# Altium PCB oxi_dev3.PcbDoc
Units mil, origin at the board's own origin, x right, y up, seen from the top; angles counter-clockwise.
Board outline 6000 x 4000 mil, 2 copper layers (Top Layer, Bottom Layer); 52 components, 44 nets, 322 pads, 0 vias.
Unrouted connection lines stored in the file: 158.
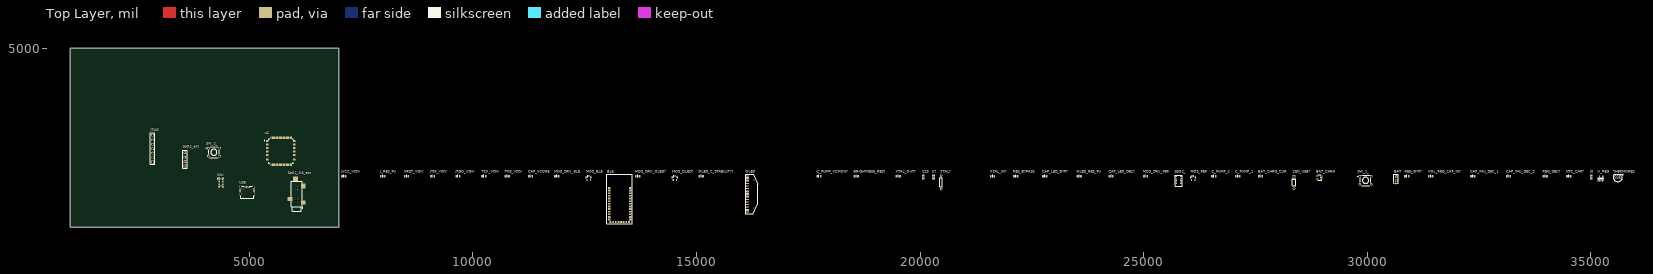
[diagram p0: Top Layer view]
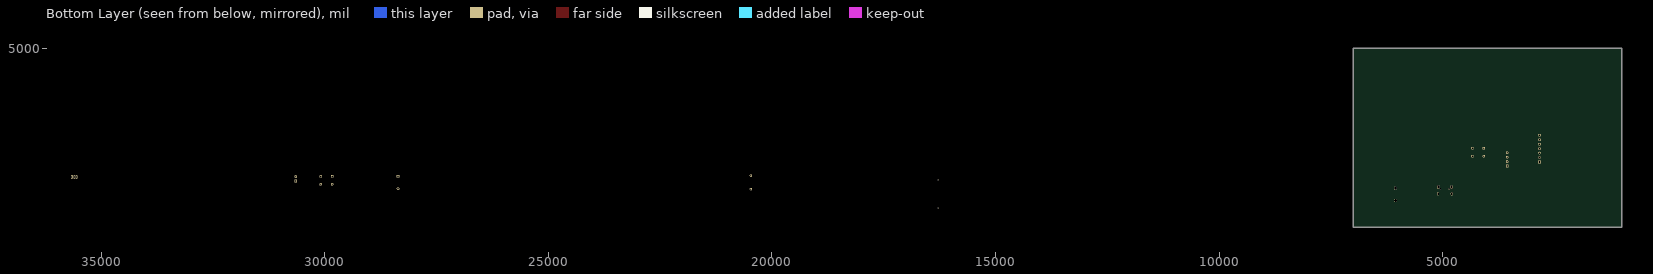
[diagram p1: Bottom Layer view, seen from below]

## Layer stack, top to bottom
Top Solder: solder mask 0.4, Solder Resist, Dk 3.5
Top Layer: signal copper 1.4
Dielectric 1: dielectric 12.6, FR-4, Dk 4.8
Bottom Layer: signal copper 1.4
Bottom Solder: solder mask 0.4, Solder Resist, Dk 3.5

## Board outline
1000,1000 7000,1000 7000,5000 1000,5000

## Design rules (kind name [scope] priority, off if disabled: settings)
Clearance [All] p1: gap=10 ignorepadtopadclearanceinfootprint=FALSE except(0: Arc-Hole Track-Hole SMDPad-Hole THPad-Hole Via-Hole Fill-Hole Poly-Hole Region-Hole Text-Hole)
PolygonConnect [All] p1: connectstyle=Relief reliefconductorwidth=10 reliefentries=4 polygonreliefangle="90 Angle" airgapwidth=10
RoutingVias [All] p1: holewidth=28 width=50 viastyle="Through Hole" minholewidth=28 minwidth=50 maxholewidth=28 maxwidth=50
SolderMaskExpansion [All] p1: expansion=4
Width [All] p1: maxlimit=10 minlimit=10 preferedwidth=10
30 further rules are at their usual default settings.

## Components (designator, comment, footprint, x,y, rotation, side; value= is the part's Value field where it differs from the comment)
BAT "Battery" BAT-2 30645,2080 r90 top
BAT_CHRG "LTC4054-4.2" S5 28925,2110 r90 top
BAT_CHRG_CUR "TBD" SMD-0805C 27610,2140 r90 top
BLE "HM-16" HM-16 13030,2155 r0 top
BRIGHTNESS_RES? "Res3" SMD-0805C 18570,2140 r90 top value=390k
C23 "Cap Dec msp VCC" SMD-0805C 20070,2120 r0 top value=4.7uF
C? "Cap Dec msp VCC" SMD-0805C 20300,2120 r0 top value=100nF
C_PUMP_1 "Cap Semi" SMD-0805C 27100,2140 r90 top value=1uF
C_PUMP_2 "Cap Semi" SMD-0805C 26570,2140 r90 top value=1uF
C_PUMP_VCMON? "Cap Semi" SMD-0805C 17740,2140 r90 top value=10uF
CAP_IMU_DEC_1 "Cap Semi" SMD-0805C 32355,2140 r90 top value=10uF
CAP_IMU_DEC_2 "Cap Semi" SMD-0805C 33155,2140 r90 top value=0.1uF
CAP_LED_BYP? "Cap Semi" SMD-0805C 22790,2140 r90 top value=0.1nF
CAP_LED_DEC? "Cap Semi" SMD-0805C 24270,2140 r90 top value=10nF
CAP_VCORE "Cap Semi" SMD-0805C 11290,2140 r90 top value=470nF
IMU "ADXL345" ADXL345 4370,2000.87 r0 top
J0 "SC_USB_ONLY" SMD-0805C 35005,2120 r0 top
J_RES_PU "10k" SMD-0805C 7985,2140 r90 top value=1K
JTAG "Header 7" HDR1X7 2840,2455 r90 top
JTDI_VDIV "100" SMD-0805C 9100,2140 r90 top value=1K
JTDO_VDIV "100" SMD-0805C 9670,2140 r90 top value=1K
JVCC_VDIV "22" SMD-0805C 7115,2140 r90 top value=1K
MOS_BLE "FDN360P" SOT23_N 12595,2095 r90 top
MOS_DRV_BLE "10K" SMD-0805C 11880,2140 r90 top value=1K
MOS_DRV_OLED? "10K" SMD-0805C 13685,2140 r90 top value=1K
MOS_DRV_PER "10K" SMD-0805C 25040,2140 r90 top value=1K
MOS_OLED? "FDN360P" SOT23_N 14520,2095 r90 top
MOS_PER "FDN360P" SOT23_N 26110,2095 r90 top
NRST_VDIV "100" SMD-0805C 8520,2140 r90 top value=1K
NTC_CAP? "Cap Semi" SMD-0805C 34505,2140 r90 top value=10uF
OLED "OLED" OLED0.96_NO3D 16140,1340 r90 top
OLED_C_STABILITY? "Cap Semi" SMD-0805C 15105,2140 r90 top value=10uF
OLED_RES_PU "Res3" SMD-0805C 23560,2140 r90 top value=4.7k
REG_BYP? "1uf" SMD-0805C 30885,2140 r90 top
REG_DEC? "2.2uf" SMD-0805C 33975,2140 r90 top
RES_BYPASS "Cap Semi" SMD-0805C 22140,2140 r90 top value=10uF
SpO2_ "MAX30102EFD+" PSON80P330X560X165-14N 25780,2040 r0 top
SpO2_3.5_ext "SJ-3524-SMT" CUI_SJ-3524-SMT 6065,1594.41 r90 top
SpO2_ext "Header 4" HDR1X4 3565,2365 r90 top
SW_1_ "SW DIP-2" PUSH_BTN 29955,2045 r0 top
SW_2_ "SW DIP-2" PUSH_BTN 4207.95,2673.58 r0 top
TCK_VDIV "100" SMD-0805C 10250,2140 r90 top value=1K
THERMORES "MCP9700A-E/TO" TO-92-TO3 35600,2120 r90 top
TMS_VDIV "100" SMD-0805C 10770,2140 r90 top value=1K
uC "MSP430F5438AIPZ" QFP50P1600X1600X160-100N 5711.97,2699.06 r0 top
USB "Micro USB 2.0 Type B Receptacle" 629105150521 4955,1780 r0 top
V_REG "MIC5205" SOT-23-OT5_N 35225,2090 r90 top
VOL_REG_CAP_IN? "Cap Semi" SMD-0805C 31415,2140 r90 top value=10uF
XTAL? "XTAL" AXIAL-0.3 20470,2000 r90 top
XTAL_IN? "Cap Semi" SMD-0805C 21620,2140 r90 top value=4.3pF
XTAL_OUT? "Cap Semi" SMD-0805C 19510,2140 r90 top value=4.3pF
ZEN_USB? "5V" DO-35 28360,2000 r90 top

## Footprints (in the part's own frame and the unit in brackets; to place one, negate y for a bottom-side part, rotate by r counter-clockwise, add the part's x,y. Pads: shape width x height; smd on the part's side, far side on the other; paste and mask are expansions set on the pad)
629105150521 [mm] "Micro USB 2.0 SMT Type B Horizontal 5 Contacts High Current"
  rect 0.45x1.3 smd: 1(-1.3,2.9) 2(-0.65,2.9) 3(0,2.9) 4(0.65,2.9) 5(1.3,2.9)
  round 0.8 hole 0.8 unplated: MH1(-2.5,1.85) MH2(2.5,1.85)
  oval 1.45x2 hole 0.85 slot 1.4 at 90 deg: S1(-3.725,2.9) S2(3.725,2.9)
  oval 1.15x1.8 hole 0.55 slot 1.2 at 90 deg: S3(-3.875,-0.9) S4(3.875,-0.9)
  silkscreen extent -4,-3.3 4,3.3, body extent -4,-3.3 4,3.3, height 2.75
ADXL345 [mm]
  rect 0.92x0.61 smd: 1(-1.01,2) 2(-1.01,1.2) 3(-1.01,0.4) 4(-1.01,-0.4) 5(-1.01,-1.2) 6(-1.01,-2) 8(1.01,-2) 9(1.01,-1.2) 10(1.01,-0.4) 11(1.01,0.4) 12(1.01,1.2) 13(1.01,2)
  rect 0.61x0.92 smd: 7(0,-2.01) 14(0,2.01)
  silkscreen extent -2.1,-2.62 1.5,2.62, body extent -1.5,-2.5 1.5,2.5, height 1
AXIAL-0.3 [mm] "Axial Device, Thru-Hole; 2 Leads; 0.3 in Pin Spacing"
  round 1.4 hole 0.85: 1(-3.81,0) 2(3.81,0)
  silkscreen extent -2.77,-0.76 2.77,0.76
BAT-2 [mm] "Battery; 2 Leads"
  rect 1.5x1.5 hole 0.9: 1(-1.27,0)
  round 1.5 hole 0.9: 2(1.27,0)
  silkscreen extent -2.54,-1.27 2.54,1.27
CUI_SJ-3524-SMT [mm]
  rect 2.2x2.8 smd: 1(-1.1,-3.7) 3(0.9,3.7)
  rect 2.8x2.8 smd: 2(8.3,-3.7)
  rect 2.6x2.8 smd: 4(12.3,0.75)
  round 1.7 hole 1.7 unplated: ""(0,0) ""(7,0)
  silkscreen extent -6,-3.4 11,3, body extent -5.94,-4.44 13.06,4.56, height 5.1
DO-35 [mm] "Diode, Axial; Body 3.8 x 1.9 mm (LxDia. max), Lead Dia. 0.53 mm (max)"
  round 1.5 hole 0.9: 1(-3.55,0)
  rect 1.5x1.5 hole 0.9: 2(3.55,0)
  silkscreen extent -1.95,-0.95 2.05,0.95
HDR1X4 [mm] "Connector; Header; 4 Position"
  rect 1.5x1.5 hole 0.9: 1(0,0)
  round 1.5 hole 0.9: 2(2.54,0) 3(5.08,0) 4(7.62,0)
  silkscreen extent -1.27,-1.27 8.89,1.27
HDR1X7 [mm] "Connector; Header; 7 Position"
  rect 1.5x1.5 hole 0.9: 1(0,0)
  round 1.5 hole 0.9: 2(2.54,0) 3(5.08,0) 4(7.62,0) 5(10.16,0) 6(12.7,0) 7(15.24,0)
  silkscreen extent -1.27,-1.27 16.51,1.27
HM-16 [mm]
  rect 1.25x1 smd: 1(0.508,-7.1) 2(0.508,-8.6) 3(0.508,-10.1) 4(0.508,-11.6) 5(0.508,-13.1) 6(0.508,-14.6) 7(0.508,-16.1) 8(0.508,-17.6) 9(0.508,-19.1) 10(0.508,-20.6) 11(0.508,-22.1) 12(0.508,-23.6) 13(0.508,-25.1) 22(12.492,-25.1) 23(12.492,-23.6) 24(12.492,-22.11) 25(12.492,-20.6) 26(12.492,-19.1) 27(12.492,-17.6) 28(12.492,-16.1) 29(12.492,-14.6) 30(12.492,-13.1) 31(12.492,-11.6) 32(12.492,-10.1) 33(12.492,-8.6) 34(12.492,-7.1)
  rect 1x1.25 smd: 14(1.27,-26.416) 15(2.76,-26.416) 16(4.25,-26.416) 17(5.74,-26.416) 18(7.23,-26.416) 19(8.72,-26.416) 20(10.21,-26.416) 21(11.7,-26.416)
  silkscreen extent -0.76,-27.56 13.72,0.64
OLED0.96_NO3D [mm]
  round 0.8 hole 0.8 unplated: 0(2.15,-3.79) 0(18.15,-3.79)
  rrect30% 0.4x2 smd: 1(0,0) 2(0.7,0) 3(1.4,0) 4(2.1,0) 5(2.8,0) 6(3.5,0) 7(4.2,0) 8(4.9,0) 9(5.6,0) 10(6.3,0) 11(7,0) 12(7.7,0) 13(8.4,0) 14(9.1,0) 15(9.8,0) 16(10.5,0) 17(11.2,0) 18(11.9,0) 19(12.6,0) 20(13.3,0) 21(14,0) 22(14.7,0) 23(15.4,0) 24(16.1,0) 25(16.8,0) 26(17.5,0) 27(18.2,0) 28(18.9,0) 29(19.6,0) 30(20.3,0)
  silkscreen extent -1.03,-6 21.33,1.14
PSON80P330X560X165-14N [mm]
  rect 0.84x0.4 smd: 1(-1.195,2.4) 2(-1.195,1.6) 3(-1.195,0.8) 4(-1.195,0) 5(-1.195,-0.8) 6(-1.195,-1.6) 7(-1.195,-2.4) 8(1.195,-2.4) 9(1.195,-1.6) 10(1.195,-0.8) 11(1.195,0) 12(1.195,0.8) 13(1.195,1.6) 14(1.195,2.4)
  silkscreen extent -2.3,-3.1 1.95,3.1
PUSH_BTN [mm]
  rect 1.498x1.498 hole 0.99: 1(-3.123,2.25)
  round 1.498 hole 0.99: 2(3.377,2.25) 3(-3.123,-2.25) 4(3.377,-2.25)
  silkscreen extent -4.42,-3 3.13,3, body extent -3.73,-3 4.06,3, height 5.01
QFP50P1600X1600X160-100N [mm]
  rrect25% 1.47x0.28 smd: 1(-7.67,6) 2(-7.67,5.5) 3(-7.67,5) 4(-7.67,4.5) 5(-7.67,4) 6(-7.67,3.5) 7(-7.67,3) 8(-7.67,2.5) 9(-7.67,2) 10(-7.67,1.5) 11(-7.67,1) 12(-7.67,0.5) 13(-7.67,0) 14(-7.67,-0.5) 15(-7.67,-1) 16(-7.67,-1.5) 17(-7.67,-2) 18(-7.67,-2.5) 19(-7.67,-3) 20(-7.67,-3.5) 21(-7.67,-4) 22(-7.67,-4.5) 23(-7.67,-5) 24(-7.67,-5.5) 25(-7.67,-6) 51(7.67,-6) 52(7.67,-5.5) 53(7.67,-5) 54(7.67,-4.5) 55(7.67,-4) 56(7.67,-3.5) 57(7.67,-3) 58(7.67,-2.5) 59(7.67,-2) 60(7.67,-1.5) 61(7.67,-1) 62(7.67,-0.5) 63(7.67,0) 64(7.67,0.5) 65(7.67,1) 66(7.67,1.5) 67(7.67,2) 68(7.67,2.5) 69(7.67,3) 70(7.67,3.5) 71(7.67,4) 72(7.67,4.5) 73(7.67,5) 74(7.67,5.5) 75(7.67,6)
  rrect25% 0.28x1.47 smd: 26(-6,-7.67) 27(-5.5,-7.67) 28(-5,-7.67) 29(-4.5,-7.67) 30(-4,-7.67) 31(-3.5,-7.67) 32(-3,-7.67) 33(-2.5,-7.67) 34(-2,-7.67) 35(-1.5,-7.67) 36(-1,-7.67) 37(-0.5,-7.67) 38(0,-7.67) 39(0.5,-7.67) 40(1,-7.67) 41(1.5,-7.67) 42(2,-7.67) 43(2.5,-7.67) 44(3,-7.67) 45(3.5,-7.67) 46(4,-7.67) 47(4.5,-7.67) 48(5,-7.67) 49(5.5,-7.67) 50(6,-7.67) 76(6,7.67) 77(5.5,7.67) 78(5,7.67) 79(4.5,7.67) 80(4,7.67) 81(3.5,7.67) 82(3,7.67) 83(2.5,7.67) 84(2,7.67) 85(1.5,7.67) 86(1,7.67) 87(0.5,7.67) 88(0,7.67) 89(-0.5,7.67) 90(-1,7.67) 91(-1.5,7.67) 92(-2,7.67) 93(-2.5,7.67) 94(-3,7.67) 95(-3.5,7.67) 96(-4,7.67) 97(-4.5,7.67) 98(-5,7.67) 99(-5.5,7.67) 100(-6,7.67)
  silkscreen extent -9.44,-7 7,7, body extent -8,-8 8,8, height 1.6
S5 [mm] "SOT-23/SC-74A; 5 Leads; Body 3.1 x 3 mm, inc. leads (LxW max)"
  rect 0.55x1.45 smd: 1(-0.95,-1.075) 2(0,-1.075) 3(0.95,-1.075) 4(0.95,1.075) 5(-0.95,1.075)
  silkscreen extent -1.57,-1.35 1.55,0.9
SMD-0805C [mil]
  rect 60x40 smd: 1(0,40) 2(0,-40)
  silkscreen extent -25,0 25,0, body extent -25,-39 25,39, height 35
SOT23_N [mm] "SOT23, 3-Leads, Body 2.9x1.3mm, Pitch 0.95mm, Lead Span 2.3mm - Reverse Pinning, IPC Medium Density"
  rect 1.15x0.6 smd: 1(1.125,0) 2(-1.125,-0.95) 3(-1.125,0.95)
  silkscreen extent -0.2,-1.5 1.47,1.5, body extent -0.7,-1.5 0.7,1.5, height 1.1
SOT-23-OT5_N [mm] "SOT23, 5-Leads, Body 2.9x1.6mm, Pitch 0.95mm, Lead Span 2.7mm, IPC Medium Density"
  rect 1.1x0.65 smd: 1(-1.2,0.95) 2(-1.2,0) 3(-1.2,-0.95) 4(1.2,-0.95) 5(1.2,0.95)
  silkscreen extent -1.32,-1.55 0.25,1.95, body extent -0.9,-1.55 0.9,1.55, height 1.45
TO-92-TO3 [mm] "TO, Flat Index; 3 In-Line, Axial Leads; Body Dia. 4.8mm; Leads 0.56 x 0.53 mm (max)"
  oval 2x1 hole 0.9: 1(0,-1.27) 2(0,0) 3(0,1.27)
  silkscreen extent -2.65,-3.13 1.52,2.65, body extent -2.65,-2.66 1.52,2.66, height 5.33

## Part data
BAT: "Multicell Battery", LatestRevisionDate=17-Jul-2002, LatestRevisionNote="Re-released for DXP Platform.", PackageDescription="Battery; 2 Leads", PackageReference=BAT-2, Published=24-Mar-1999, Publisher="Altium Limited"
BAT_CHRG_CUR MOS_DRV_BLE MOS_DRV_OLED? MOS_DRV_PER: library part res1, "Resistor", Published=8-Jun-2000, Publisher="Altium Limited", Revision="July-2002: Re-released for DXP Platform."
BRIGHTNESS_RES? OLED_RES_PU: "Resistor", LatestRevisionDate=29-May-2009, LatestRevisionNote="IPC-7351 Footprint Added.", PackageDescription="Chip Resistor", PackageReference=J1-0603, Published=8-Jun-2000, Publisher="Altium Limited"
C23 C?: library part "Cap Semi", "Capacitor (Semiconductor SIM Model)", LatestRevisionDate=29-May-2009, LatestRevisionNote="IPC-7351 Footprint Added.", PackageDescription="Chip Capacitor", PackageReference=C1206, Published=8-Jun-2000, Publisher="Altium Limited"
C_PUMP_1 C_PUMP_2 C_PUMP_VCMON? CAP_IMU_DEC_1 CAP_IMU_DEC_2 CAP_LED_BYP? CAP_LED_DEC? CAP_VCORE NTC_CAP? OLED_C_STABILITY? RES_BYPASS VOL_REG_CAP_IN? XTAL_IN? XTAL_OUT?: "Capacitor (Semiconductor SIM Model)", LatestRevisionDate=29-May-2009, LatestRevisionNote="IPC-7351 Footprint Added.", PackageDescription="Chip Capacitor", PackageReference=C1206, Published=8-Jun-2000, Publisher="Altium Limited"
J0: library part Jumper, "Jumper Wire", LatestRevisionDate=17-Jul-2002, LatestRevisionNote="Re-released for DXP Platform.", PackageDescription="Radial Cap, Thru-Hole; 2 Leads; 0.2 in Pin Spacing", PackageReference=RAD-0.2, Published=24-Mar-1999, Publisher="Altium Limited"
J_RES_PU JTDI_VDIV JTDO_VDIV JVCC_VDIV NRST_VDIV TCK_VDIV TMS_VDIV: library part Res1, "Resistor", Published=8-Jun-2000, Publisher="Altium Limited", Revision="July-2002: Re-released for DXP Platform."
JTAG: "Header, 7-Pin", LatestRevisionDate=17-Jul-2002, LatestRevisionNote="Re-released for DXP Platform.", Publisher="Altium Limited"
MOS_BLE MOS_OLED? MOS_PER: library part MOSFET-P, "P-Channel MOSFET", LatestRevisionDate=17-Jul-2002, LatestRevisionNote="Re-released for DXP Platform.", PackageDescription="TO, Flat Index; 3 In-Line, Axial Leads; Body Dia. 4.6mm; Lead Dia. 0.5 mm (max)", PackageReference=E3, PackageVersion=1995/1996, Published=8-Jun-2000, Publisher="Altium Limited"
OLED: library part OLED0.96
REG_BYP? REG_DEC?: library part CAP, "Capacitor"
SpO2_: "Oximeter/Heart Rate Sensor I²C Output", Package="OLGA-14 Maxim", Availability=Unavailable, MF="Maxim Integrated", MP=MAX30102EFD+, Price=None, SnapEDA_Link=https://www.snapeda.com/parts/MAX30102EFD%2B/Maxim%20Integrated/view-part/397548/?ref=snap
SpO2_3.5_ext: "3.5 mm, Stereo, Right Angle, Surface Mount _SMT_, Audio Jack Connector", Package=None, Availability=Unavailable, CUI_purchase_URL=https://www.cuidevices.com/product/interconnect/connectors/audio-connectors/jacks/sj-352x-smt-series?utm_source=snapeda.com&utm_medium=referral&utm_campaign=snapedaBOM, MF="CUI Devices", MP=SJ-3524-SMT-TR, Price=None, SnapEDA_Link=https://www.snapeda.com/parts/SJ-3524-SMT-TR/CUI%20Devices/view-part/328268/?ref=snap
SpO2_ext: "Header, 4-Pin", LatestRevisionDate=17-Jul-2002, LatestRevisionNote="Re-released for DXP Platform.", Publisher="Altium Limited"
SW_1_ SW_2_: "DIP Switch, 2 Position, SPST", LatestRevisionDate=17-Jul-2002, LatestRevisionNote="Re-released for DXP Platform.", PackageReference=DIP-4, Published=24-Mar-1999, Publisher="Altium Limited"
THERMORES: "Low-Power Linear Active Thermistor IC, 3-Pin TO-92, Extended Temperature", Supplier Part Number 1=MCP9700A-E/TO-ND, ComponentLink1Description=Datasheet, ComponentLink1URL=http://ww1.microchip.com/downloads/en/DeviceDoc/21942e.pdf, ComponentLink2Description="Packaging Specification", ComponentLink2URL=http://www.microchip.com/stellent/groups/techpub_sg/documents/packagingspec/en012702.pdf, ComponentLink3Description="Microchip.com Home", ComponentLink3URL=http://www.microchip.com/, DatasheetVersion="revE, Apr-2009", LatestRevisionDate=02-Dec-2009, LatestRevisionNote="Updated datasheet to version revE, Apr-2009.", PackageDescription="3-Lead Plastic Transistor Outline (TO) [TO-92]", PackageReference=TO-92-TO3, PackageVersion="revBB, Aug-2009", Published=29-Jan-2009, Publisher="Altium Limited", Supplier 1=Digi-Key, Supplier 2=Farnell, Supplier Part Number 2=1332164
uC: "18 MHz MCU with 256KB Flash, 16KB SRAM, 12-bit ADC, DMA, UART/SPI/I2C, Timer, HW Multiplier 100-LQFP -40 to 85", Package="LQFP-100 Texas Instruments", Availability=Unavailable, Check_prices=https://www.snapeda.com/parts/MSP430F5438AIPZ/Texas%20Instruments/view-part/374696/?ref=eda, MF="Texas Instruments", MP=MSP430F5438AIPZ, Price=None, Purchase-URL=https://pricing.snapeda.com/search/part/MSP430F5438AIPZ/?ref=eda, SnapEDA_Link=https://www.snapeda.com/parts/MSP430F5438AIPZ/Texas%20Instruments/view-part/374696/?ref=snap
USB: library part 629105150521, "Micro USB 2.0 Type B, Receptacle, Horizontal, SMT, with Pegs", Operating Temperature="-40 to +85degC", Rated Current=3A, Working Voltage=30VAC, Application="Micro USB 2.0", ComponentLink1Description=Manufacturer, ComponentLink1URL=http://www.we-online.de, ComponentLink2Description=Datasheet, ComponentLink2URL=https://katalog.we-online.com/em/datasheet/629105150521.pdf, Gender=Receptacle, Interface Type="Type B", Mounting Technology=SMT, Packaging="Tape and Reel", Part Number=629105150521, Pin Number=5, Published Date="September 2019", Publisher="Wurth Elektronik", Type=Horizontal
V_REG: "150mA Low-Noise LDO Regulator"
XTAL?: "Crystal Oscillator", LatestRevisionDate=17-Jul-2002, LatestRevisionNote="Re-released for DXP Platform.", PackageDescription="Crystal, Thru-Hole; 2 Leads; Body 3.1 x 8.2 mm (Dia.xH)", PackageReference=R38, Published=8-Jun-2000, Publisher="Altium Limited"
ZEN_USB?: library part ZENER

## Nets (pads, with @x,y where several pads share a name; then routed paths per layer and width w, separated by ;. In a path a pad name is that pad's centre, name@x,y a point inside that pad or via, vN(x,y) a via of type N, cw(c..) or ccw(c..) an arc to the next point about the centre after c; other vN are vias at no path point)
ADC_NTC: THERMORES.2 uC.97
BAT+: BAT_CHRG.3 J0.2 V_REG.1 V_REG.3
CHRG: BAT_CHRG.1 uC.19
CPU_R\E\S\E\T_Con\: JTAG.3 NRST_VDIV.1
GND: BAT.2 BAT_CHRG.2 BAT_CHRG_CUR.2 BLE.13 BLE.14 BLE.21 BLE.22 BRIGHTNESS_RES?.2 C23.1 C?.1 C_PUMP_VCMON?.2 CAP_IMU_DEC_1.1 CAP_IMU_DEC_2.1 CAP_LED_BYP?.2 CAP_LED_DEC?.2 CAP_VCORE.1 IMU.4 IMU.5 IMU.12 JTAG.1 NTC_CAP?.1 OLED.1 OLED.8 OLED.10 OLED.12 OLED.13 OLED.15 OLED.16 OLED.17 OLED.21 OLED.22 OLED.23 OLED.24 OLED.25 OLED.29 OLED.30 OLED_C_STABILITY?.2 REG_BYP?.2 REG_DEC?.2 RES_BYPASS.1 SpO2_3.5_ext.2 SpO2_.12 SpO2_ext.4 SW_1_.3 SW_1_.4 SW_2_.3 SW_2_.4 THERMORES.3 uC.12 uC.15 uC.37 uC.63 uC.88 USB.5 USB.S1 USB.S2 USB.S3 USB.S4 V_REG.2 VOL_REG_CAP_IN?.1 XTAL_IN?.1 XTAL_OUT?.1 ZEN_USB?.1
INT_IMU: IMU.8 uC.41
JNTRST: J_RES_PU.1
JTDO_Con: JTAG.5 JTDO_VDIV.1
NetBAT_CHRG_5: BAT_CHRG.5 BAT_CHRG_CUR.1
NetBRIGHTNESS_RES?_1: BRIGHTNESS_RES?.1 OLED.26
NetC_PUMP_1_1: C_PUMP_1.1 OLED.3
NetC_PUMP_1_2: C_PUMP_1.2 OLED.2
NetC_PUMP_2_1: C_PUMP_2.1 OLED.5
NetC_PUMP_2_2: C_PUMP_2.2 OLED.4
NetC_PUMP_VCMON?_1: C_PUMP_VCMON?.1 OLED.27
NetCAP_LED_BYP?_1: CAP_LED_BYP?.1 SpO2_.9 SpO2_.10
NetCAP_VCORE_2: CAP_VCORE.2 uC.62
NetJTAG_2: JTAG.2 JVCC_VDIV.1
NetREG_BYP?_1: REG_BYP?.1 V_REG.4
NRST: NRST_VDIV.2 uC.96
OLED_RES: OLED.14 OLED_RES_PU.1 RES_BYPASS.2 uC.42
PWR_BLT: MOS_BLE.1 MOS_DRV_BLE.2 uC.36
PWR_OLED: MOS_DRV_OLED?.2 MOS_OLED?.1 uC.43
PWR_PER: MOS_DRV_PER.2 MOS_PER.1
RX_BLE: uC.39 uC.40
RX_SpO2: IMU.13 OLED.19 OLED.20 SpO2_3.5_ext.4 SpO2_.3 SpO2_ext.3 uC.34 uC.54
SCL: IMU.14 OLED.18 SpO2_3.5_ext.3 SpO2_.2 SpO2_ext.2 uC.35 uC.53
SW1: SW_1_.1 SW_1_.2 uC.17
SW2: SW_2_.1 SW_2_.2 uC.18
TCK: TCK_VDIV.2 uC.95
TCK_Con: JTAG.6 TCK_VDIV.1
TDI: JTDI_VDIV.2 uC.93
TDI_Con: JTAG.4 JTDI_VDIV.1
TDO: JTDO_VDIV.2 uC.92
TMS: TMS_VDIV.2 uC.94
TMS_Con: JTAG.7 TMS_VDIV.1
TX_BLE: BLE.1 BLE.2
V+_USB: BAT_CHRG.4 J0.1 USB.1 ZEN_USB?.2
VCC: C23.2 C?.2 IMU.6 IMU.7 J_RES_PU.2 JVCC_VDIV.2 MOS_BLE.2 MOS_DRV_BLE.1 MOS_DRV_OLED?.1 MOS_DRV_PER.1 MOS_OLED?.2 MOS_PER.2 NTC_CAP?.2 REG_DEC?.1 THERMORES.1 uC.11 uC.16 uC.38 uC.64 uC.87 V_REG.5 VOL_REG_CAP_IN?.2
VCC_BLT: BLE.12 MOS_BLE.3
VCC_OLED: MOS_OLED?.3 OLED.6 OLED.9 OLED.28 OLED_C_STABILITY?.1 OLED_RES_PU.2
VCC_PER: CAP_IMU_DEC_1.2 CAP_IMU_DEC_2.2 CAP_LED_DEC?.1 IMU.1 MOS_PER.3 SpO2_3.5_ext.1 SpO2_.4 SpO2_ext.1
XTIN: uC.13 XTAL?.2 XTAL_IN?.2
XTOUT: uC.14 XTAL?.1 XTAL_OUT?.2
pads on no net: BAT.1 BLE.3 BLE.4 BLE.5 BLE.6 BLE.7 BLE.8 BLE.9 BLE.10 BLE.11 BLE.15 BLE.16 BLE.17 BLE.18 BLE.19 BLE.20 BLE.23 BLE.24 BLE.25 BLE.26 BLE.27 BLE.28 BLE.29 BLE.30 BLE.31 BLE.32 BLE.33 BLE.34 IMU.2 IMU.3 IMU.9 IMU.10 IMU.11 OLED.0 OLED.7 OLED.11 SpO2_3.5_ext. SpO2_.1 SpO2_.5 SpO2_.6 SpO2_.7 SpO2_.8 SpO2_.11 SpO2_.13 SpO2_.14 uC.1 uC.2 uC.3 uC.4 uC.5 uC.6 uC.7 uC.8 uC.9 uC.10 uC.20 uC.21 uC.22 uC.23 uC.24 uC.25 uC.26 uC.27 uC.28 uC.29 uC.30 uC.31 uC.32 uC.33 uC.44 uC.45 uC.46 uC.47 uC.48 uC.49 uC.50 uC.51 uC.52 uC.55 uC.56 uC.57 uC.58 uC.59 uC.60 uC.61 uC.65 uC.66 uC.67 uC.68 uC.69 uC.70 uC.71 uC.72 uC.73 uC.74 uC.75 uC.76 uC.77 uC.78 uC.79 uC.80 uC.81 uC.82 uC.83 uC.84 uC.85 uC.86 uC.89 uC.90 uC.91 uC.98 uC.99 uC.100 USB.2 USB.3 USB.4 USB.MH1 USB.MH2

## Text inside footprints (layer, text, board x,y; h text height)
BAT: Top Overlay "+" at 30667.72,1935.51 h45.28 r90
USB: Mechanical 2 "PCB Edge" at 4903.82,1650.08 h16